# EAGLE board mbhp_line_driver_receiver_v1 (EAGLE 6.4)
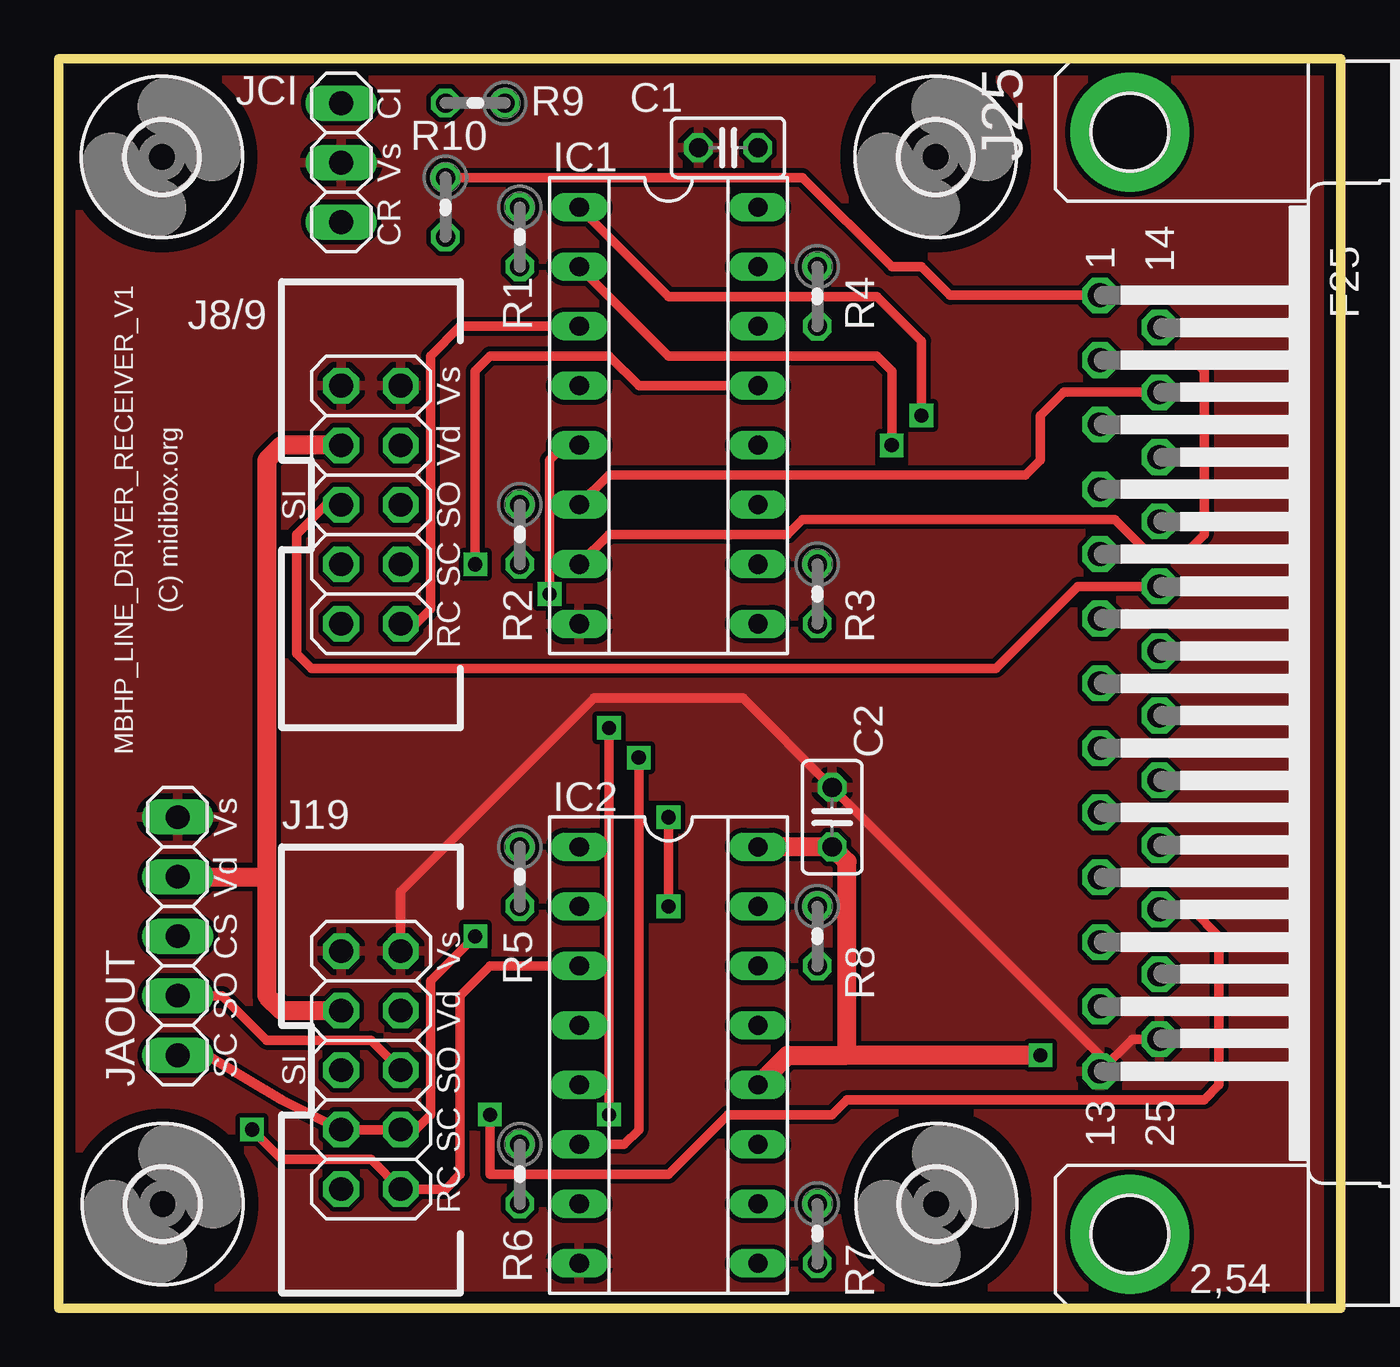
[diagram p0: board, top side]
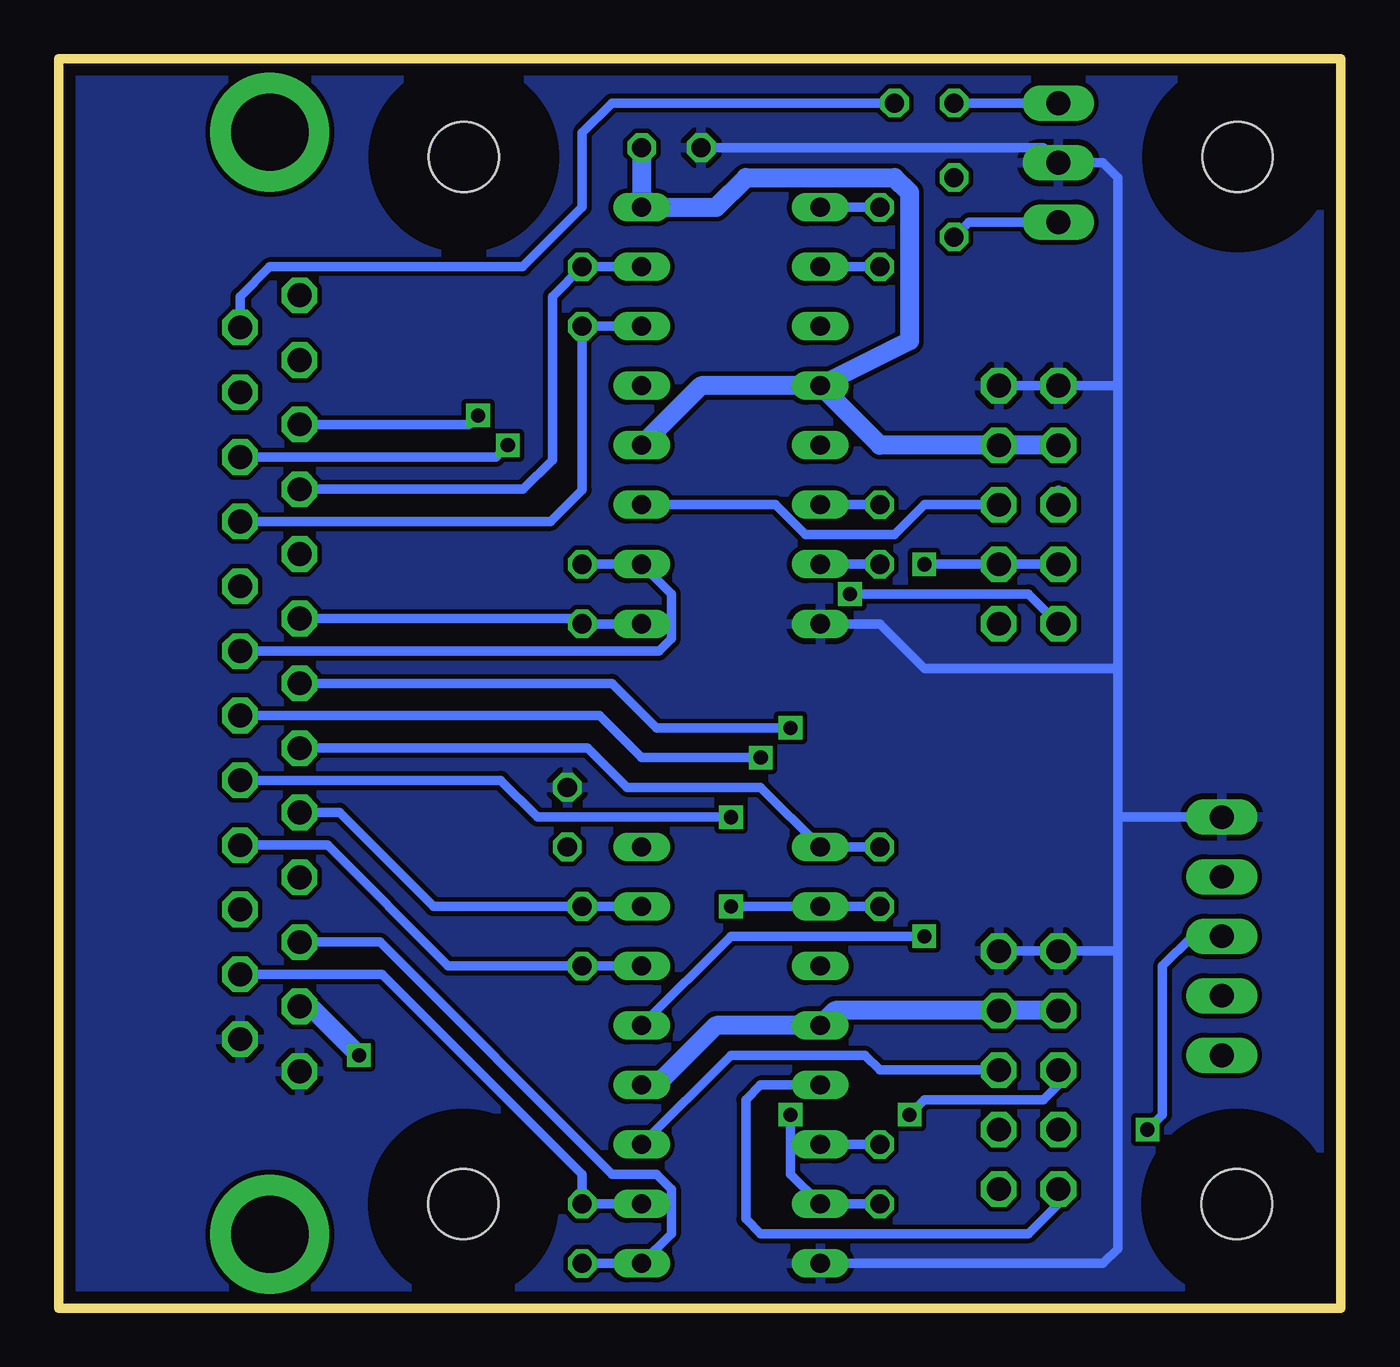
[diagram p1: board, bottom side, seen from below]

Size 54.73 x 53.34 mm. Coordinates in mm from the lower left corner, seen from the top.
Outline: 0,0 0,53.34 54.73,53.34 54.73,0 0,0
Copper layers (1*16): Top 0.035mm / dielectric 1.5mm / Bottom 0.035mm
Design rules "default": minimum track width 8mil, minimum drill 0.6mm, track to track 8mil, track to pad 8mil, pad to pad 8mil, via to via 8mil, smd to smd 0mil, copper to edge 20mil, drill to drill 10mil, minimum pad ring 8mil, minimum via ring 8mil, stop-mask expansion 0mil, vias tented up to drill 0mil, thermal gap 10mil

## Footprints (pad centres in the part's own frame; a part is rotated, then mirrored left to right if it is on the bottom)
C025-025X050 = drill 0.813 octagon: 1 -1.27,0; 2 1.27,0
3,0 = hole 3: 0,0
SOCKET-16 = drill 0.813 long: 1 -8.89,-3.81; 2 -6.35,-3.81; 3 -3.81,-3.81; 4 -1.27,-3.81; 5 1.27,-3.81; 6 3.81,-3.81; 7 6.35,-3.81; 8 8.89,-3.81; 9 8.89,3.81; 10 6.35,3.81; 11 3.81,3.81; 12 1.27,3.81; 13 -1.27,3.81; 14 -3.81,3.81; 15 -6.35,3.81; 16 -8.89,3.81
2X05 = drill 1.016 octagon: 1 -5.08,-1.27; 2 -5.08,1.27; 3 -2.54,-1.27; 4 -2.54,1.27; 5 0,-1.27; 6 0,1.27; 7 2.54,-1.27; 8 2.54,1.27; 9 5.08,-1.27; 10 5.08,1.27
F25HP = drill 1.016 octagon: 1 -16.561,-1.27; 2 -13.792,-1.27; 3 -11.049,-1.27; 4 -8.28,-1.27; 5 -5.512,-1.27; 6 -2.769,-1.27; 7 0,-1.27; 8 2.769,-1.27; 9 5.512,-1.27; 10 8.28,-1.27; 11 11.049,-1.27; 12 13.792,-1.27; 13 16.561,-1.27; 14 -15.189,1.27; 15 -12.421,1.27; 16 -9.652,1.27; 17 -6.909,1.27; 18 -4.14,1.27; 19 -1.372,1.27; 20 1.372,1.27; 21 4.14,1.27; 22 6.909,1.27; 23 9.652,1.27; 24 12.421,1.27; 25 15.189,1.27 | drill 3.302 pad 5.08: G1 -23.52,0; G2 23.52,0
1X05 = drill 1.016 long: 1 -5.08,0; 2 -2.54,0; 3 0,0; 4 2.54,0; 5 5.08,0
1X03 = drill 1.016 long: 1 -2.54,0; 2 0,0; 3 2.54,0
0204V = drill 0.813 octagon: 1 -1.27,0; 2 1.27,0

## Placement (x,y rotation side)
C1  100n  [C025-025X050]  28.57,49.53 0 top
C2  100n  [C025-025X050]  33.02,20.95 270 top
E$1  [3,0]  37.47,4.45 0 top
E$2  [3,0]  37.44,49.13 0 top
E$4  [3,0]  4.45,4.45 0 top
E$7  [3,0]  4.42,49.13 0 top
IC1  MC3486  [SOCKET-16]  26.04,38.1 270 top
IC2  MC3486  [SOCKET-16]  26.04,10.79 270 top
J8/9  [2X05]  13.34,34.29 270 top
J19  [2X05]  13.34,10.16 270 top
J25  [F25HP]  45.72,26.67 270 top
JAOUT  [1X05]  5.08,15.88 90 top
JCI  [1X03]  12.06,48.9 90 top
R1  100  [0204V]  19.68,45.72 270 top
R2  100  [0204V]  19.68,33.02 270 top
R3  100  [0204V]  32.38,30.48 270 top
R4  100  [0204V]  32.38,43.18 270 top
R5  100  [0204V]  19.68,18.41 270 top
R6  100  [0204V]  19.68,5.71 270 top
R7  100  [0204V]  32.38,3.17 270 top
R8  100  [0204V]  32.38,15.88 270 top
R9  100  [0204V]  17.78,51.44 180 top
R10  100  [0204V]  16.51,46.99 270 top

## Library data of the parts
C1 C2 R1-R10 = rcl
E$1 E$2 E$4 E$7 = holes
IC1 IC2 = ic-package
J8/9 J19 JAOUT JCI = pinhead
J25 = con-subd

## Nets
5V: C1.2 C2.2 IC1.4 IC1.12 IC1.16 IC2.4 IC2.12 IC2.16 J8/9.3 J8/9.4 J19.3 J19.4 J25.12 JAOUT.4
GND: C1.1 C2.1 IC1.8 IC2.8 J8/9.1 J8/9.2 J19.1 J19.2 J25.13 J25.25 JAOUT.5 JCI.2
S$1: IC2.11 J19.6 JAOUT.2
S$2: J19.5 J25.23
S$3: IC2.3 J19.10 JAOUT.3
S$4: IC2.13 J19.7 J19.8 JAOUT.1
S$5: IC2.5 J19.9
S$6: IC1.3 J8/9.10
S$7: IC1.5 J8/9.9
S$8: IC1.11 J8/9.6
S$9: IC1.13 J8/9.7 J8/9.8
S$10: IC1.15 J25.4 R4.1
S$11: IC1.14 J25.17 R4.2
S$12: IC1.10 J25.19 R3.1
S$13: IC1.9 J25.6 R3.2
S$14: IC2.15 J25.9 R8.1
S$15: IC2.14 J25.22 R8.2
S$16: IC2.10 J25.24 R7.1
S$17: IC2.9 J25.11 R7.2
S$18: IC2.2 J25.21 R5.2
S$19: IC2.1 J25.8 R5.1
S$21: IC2.6 J25.20 R6.1
S$22: IC2.7 J25.7 R6.2
S$24: IC1.7 J25.2 R2.2
S$25: IC1.6 J25.15 R2.1
S$26: IC1.2 J25.16 R1.2
S$27: IC1.1 J25.3 R1.1
S$28: JCI.1 R10.2
S$29: JCI.3 R9.2
S$30: J25.14 R9.1
S$31: J25.1 R10.1
SI1: J8/9.5 J25.18

## Tracks (layer width: path | path; a pad name or v marks a point on that pad's centre or on a via)
5V  (via drill 0.6)
  Top 0.813: IC2.16 C2.2 33.66,19.05 33.66,10.79 | J19.3 9.53,12.7 8.89,13.34 8.89,18.41 | J8/9.3 9.53,36.83 8.89,36.2 8.89,18.41 | v41.91,10.79 33.66,10.79 | IC2.12 31.11,10.79 33.66,10.79 | JAOUT.4 8.89,18.41
  Bottom 0.813: J19.3 J19.4 21.59,12.7 IC2.4 26.67,12.06 29.21,9.53 IC2.12 | J8/9.3 J8/9.4 19.68,36.83 IC1.4 | IC1.4 27.3,39.37 IC1.12 | C1.2 IC1.16 26.67,46.99 25.4,48.26 19.05,48.26 18.41,47.62 18.41,41.27 IC1.4 | J25.12 43.99,12.88 v41.91,10.79
GND
  Top 0.406: J25.25 45.82,11.48 J25.13 44.45,10.79 C2.1 29.21,26.04 22.86,26.04 14.61,17.78 J19.2
  Bottom 0.406: 9.53,39.37 9.53,48.26 10.16,48.9 JCI.2 12.7,49.53 C1.1 | 9.53,39.37 9.53,27.3 | 9.53,27.3 9.53,20.95 | 9.53,20.95 9.53,15.24 | J19.2 J19.1 9.53,15.24 | J8/9.2 J8/9.1 9.53,39.37 | IC2.8 10.16,1.91 9.53,2.54 9.53,15.24 | IC1.8 19.68,29.21 17.78,27.3 9.53,27.3 | JAOUT.5 9.53,20.95
  pour Top: 0,53.34 54.61,53.34 54.61,0 0,0
  pour Bottom: 0,53.34 54.61,53.34 54.61,0 0,0
S$1
  Top 0.406: JAOUT.2 6.99,13.34 8.89,11.43 13.34,11.43 J19.6
  Bottom 0.406: J19.6 19.68,10.16 20.32,10.79 26.04,10.79 IC2.11
S$2  (via drill 0.6)
  Top 0.406: v18.41,8.26 18.41,5.71 26.04,5.71 28.57,8.26 33.02,8.26 33.66,8.89 48.9,8.89 49.53,9.53 49.53,15.88 48.39,17.02 J25.23
  Bottom 0.406: J19.5 12.06,9.53 12.7,8.89 17.78,8.89 v18.41,8.26
S$3  (via drill 0.6)
  Top 0.406: IC2.3 18.41,14.61 17.14,13.34 17.14,5.71 16.51,5.08 J19.10 13.34,6.35 9.53,6.35 v8.26,7.62
  Bottom 0.406: JAOUT.3 6.35,15.88 7.62,14.61 7.62,8.26 v8.26,7.62
S$4  (via drill 0.6)
  Top 0.406: v17.78,15.88 15.88,13.97 15.88,8.26 15.24,7.62 J19.8 J19.7 9.53,8.89 6.35,10.79 JAOUT.1
  Bottom 0.406: v17.78,15.88 26.04,15.88 IC2.13
S$5
  Bottom 0.406: IC2.5 24.77,9.53 25.4,8.89 25.4,3.81 24.77,3.17 13.34,3.17 12.06,4.45 J19.9
S$6
  Top 0.406: J8/9.10 15.24,29.21 15.88,29.84 15.88,40.64 17.14,41.91 IC1.3
S$7  (via drill 0.6)
  Top 0.406: IC1.5 21.59,36.83 20.95,36.2 v20.95,30.48
  Bottom 0.406: v20.95,30.48 13.34,30.48 J8/9.9
S$8
  Bottom 0.406: IC1.11 24.13,34.29 22.86,33.02 19.05,33.02 17.78,34.29 J8/9.6
S$9  (via drill 0.6)
  Top 0.406: IC1.13 24.77,39.37 23.5,40.64 18.41,40.64 17.78,40.01 v17.78,31.75
  Bottom 0.406: J8/9.7 J8/9.8 v17.78,31.75
S$10
  Bottom 0.406: IC1.15 R4.1 33.66,43.18 33.66,36.2 34.9,34.95 J25.4
S$11
  Bottom 0.406: IC1.14 R4.2 32.38,34.92 33.73,33.58 J25.17
S$12
  Bottom 0.406: R3.1 IC1.10 28.57,30.48 28.57,28.57 29.11,28.04 J25.19
S$13
  Bottom 0.406: IC1.9 R3.2 32.61,29.44 J25.6
S$14
  Bottom 0.406: IC2.15 R8.1 38.73,17.14 42.75,21.16 J25.9
S$15
  Bottom 0.406: IC2.14 R8.2 38.1,14.61 43.26,19.76 J25.22
S$16
  Bottom 0.406: IC2.10 R7.1 32.38,5.71 40.92,14.25 J25.24
S$17
  Bottom 0.406: R7.2 IC2.9 28.57,3.17 28.57,5.08 29.21,5.71 31.11,5.71 41.02,15.62 J25.11
S$18  (via drill 0.6)
  Top 0.406: v26.04,20.95 v26.04,17.14
  Bottom 0.406: R5.2 IC2.2 v26.04,17.14 | J25.21 35.87,22.53 34.29,20.95 v26.04,20.95
S$19
  Bottom 0.406: R5.1 IC2.1 24.77,22.23 30.48,22.23 32.16,23.9 J25.8
S$21  (via drill 0.6)
  Top 0.406: v24.77,23.5 24.77,7.62 24.13,6.99 IC2.6
  Bottom 0.406: R6.1 IC2.6 | J25.20 31.65,25.3 29.84,23.5 v24.77,23.5
S$22  (via drill 0.6)
  Top 0.406: v23.5,24.77 v23.5,8.26
  Bottom 0.406: R6.2 IC2.7 23.5,5.71 v23.5,8.26 | J25.7 31.11,26.67 29.21,24.77 v23.5,24.77
S$24
  Top 0.406: J25.2 48.44,40.46 48.9,40.01 48.9,33.02 48.26,32.38 46.35,32.38 45.09,33.66 31.75,33.66 31.11,33.02 23.5,33.02 IC1.7
  Bottom 0.406: R2.2 IC1.7
S$25
  Top 0.406: J25.15 42.9,39.09 41.91,38.1 41.91,36.2 41.27,35.56 23.5,35.56 IC1.6
  Bottom 0.406: R2.1 IC1.6
S$26  (via drill 0.6)
  Top 0.406: v35.56,36.83 35.56,40.01 34.92,40.64 26.04,40.64 IC1.2
  Bottom 0.406: R1.2 IC1.2 | J25.16 36.07,36.32 v35.56,36.83
S$27  (via drill 0.6)
  Top 0.406: v36.83,38.1 36.83,41.27 34.92,43.18 26.04,43.18 IC1.1
  Bottom 0.406: R1.1 IC1.1 | J25.3 37.21,37.72 v36.83,38.1
S$28
  Bottom 0.406: JCI.1 15.88,46.35 R10.2
S$29
  Bottom 0.406: JCI.3 R9.2
S$30
  Bottom 0.406: R9.1 31.11,51.44 32.38,50.16 32.38,46.99 34.92,44.45 45.72,44.45 46.99,43.18 J25.14
S$31
  Top 0.406: J25.1 38.05,43.23 36.83,44.45 35.56,44.45 31.75,48.26 R10.1
SI1
  Top 0.406: J25.18 43.51,30.81 40.01,27.3 10.79,27.3 10.16,27.94 10.16,33.02 11.43,34.29 J8/9.5
  Bottom 0.406: J8/9.5 12.06,34.92

## Text on the board
tNames: CI | Vs | CR | Vs | Vd | MBHP_LINE_DRIVER_RECEIVER_V1 | (C) midibox.org | SI | SO | SC | RC | Vs | Vd | CS | Vs | SO | Vd | SC | SI | SO | SC | RC